# EAGLE board TA323v1 (EAGLE 7.2.0)
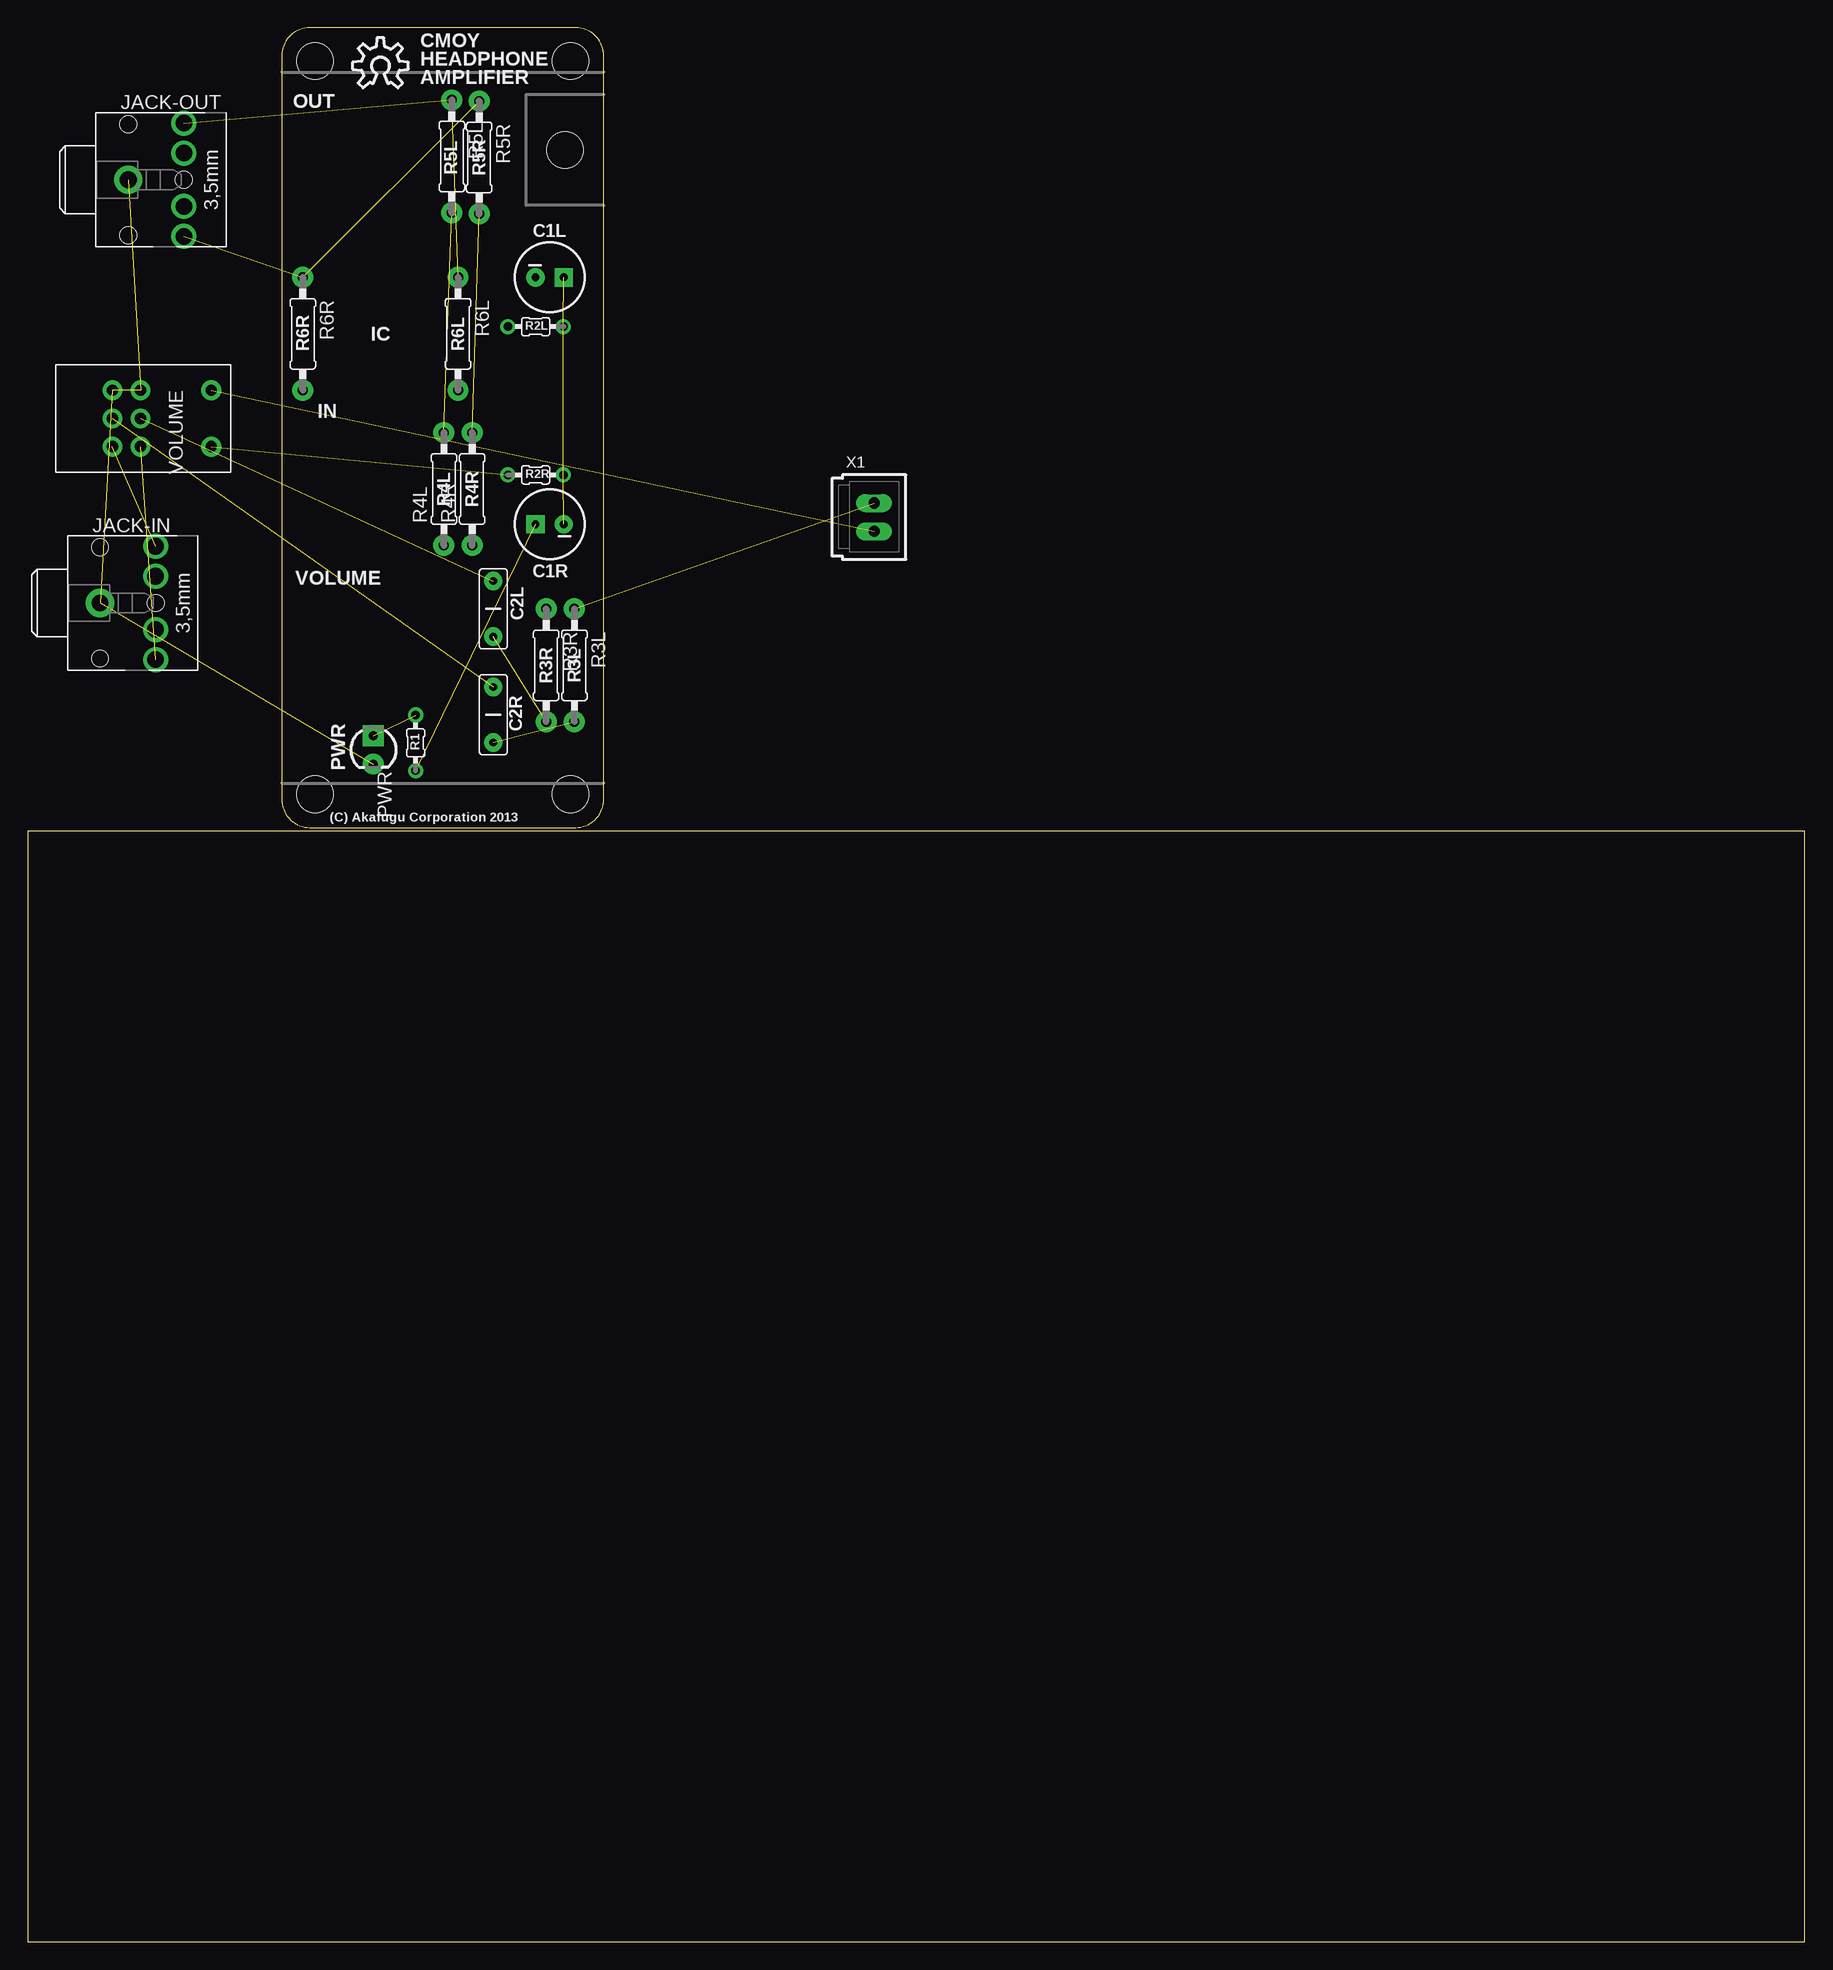
[diagram p0: board, top side]
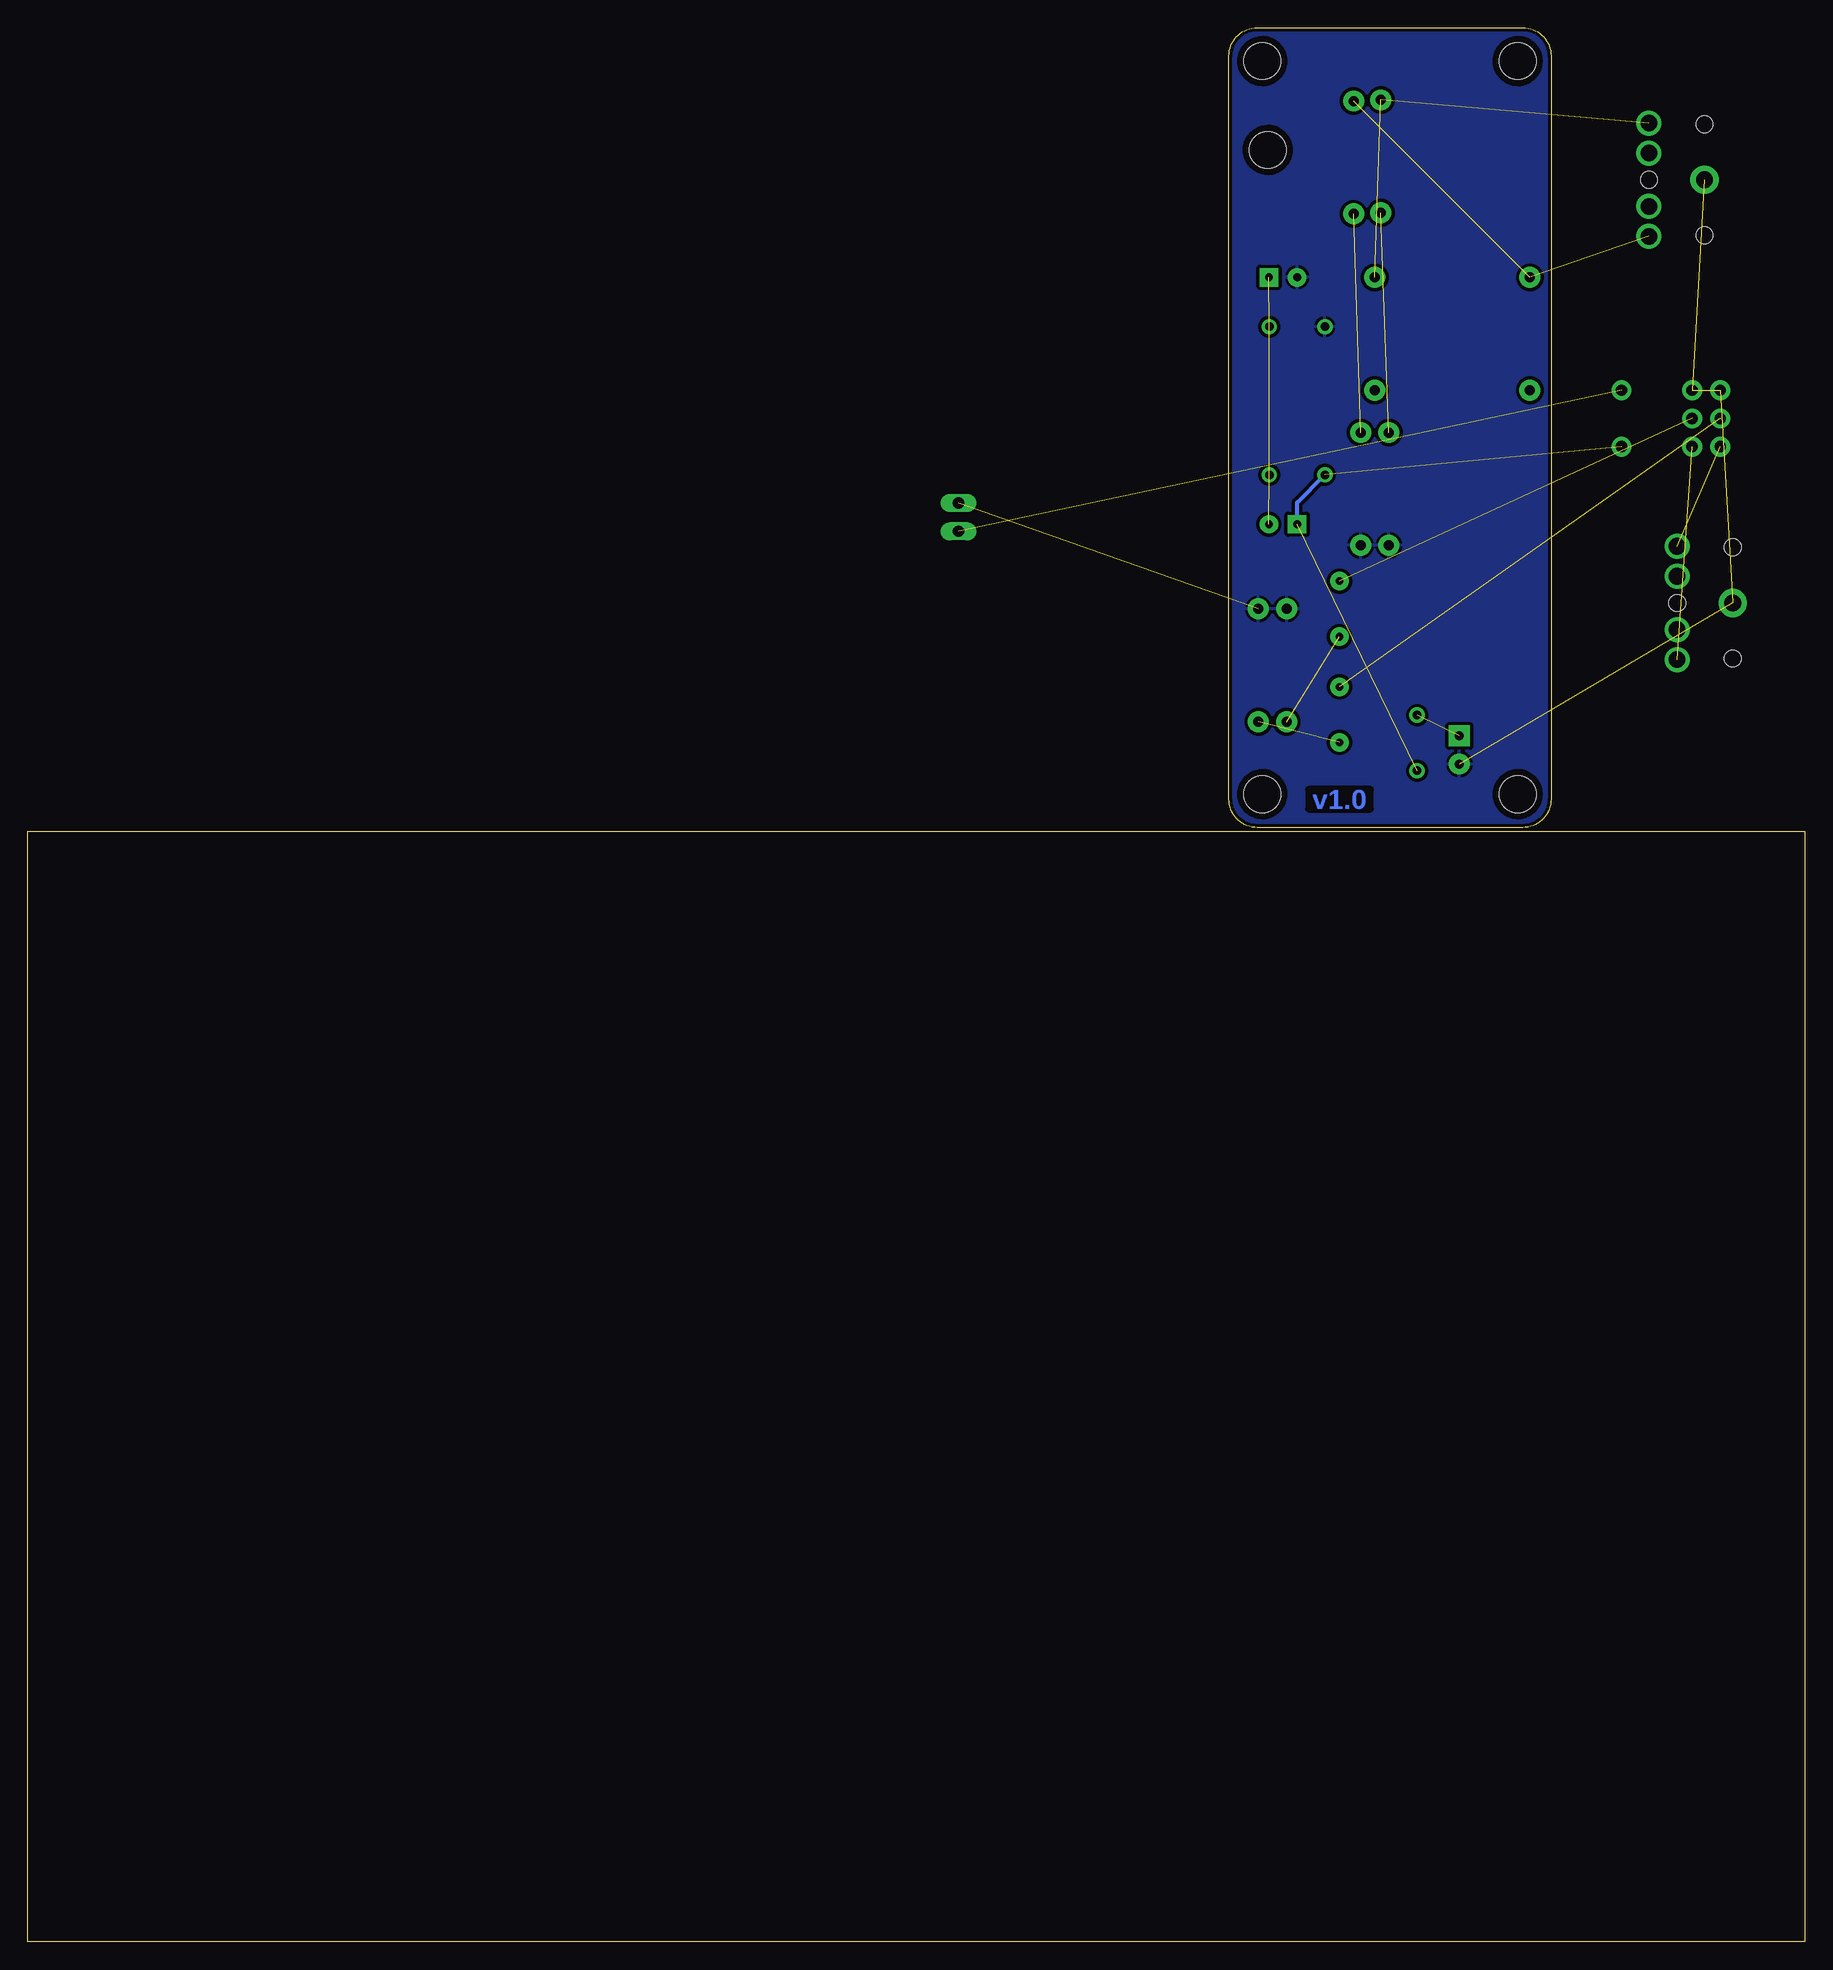
[diagram p1: board, bottom side, seen from below]

Size 160 x 172.33 mm. Coordinates in mm from the lower left corner, seen from the top.
Outline: 22.86,169.79 22.86,102.87 arc90 25.4,100.33 49.32,100.33 arc90 51.86,102.87 51.86,169.79 arc90 49.32,172.33 25.4,172.33 arc90 22.86,169.79
Outline: 0,0 160,0 160,100 0,100 0,0
Copper layers (1*16): Top 0.035mm / dielectric 1.5mm / Bottom 0.035mm
Design rules "default": minimum track width 10mil, minimum drill 12mil, track to track 8mil, track to pad 8mil, pad to pad 8mil, via to via 8mil, smd to smd 0mil, copper to edge 12mil, drill to drill 10mil, minimum pad ring 12mil, minimum via ring 6mil, stop-mask expansion 2mil, vias tented up to drill 45mil, thermal gap 10mil
Net classes: 0 default: width 0.254 mm, drill 0.305 mm, clearance 0.152 mm

## Footprints (pad centres in the part's own frame; a part is rotated, then mirrored left to right if it is on the bottom)
CPOL-RADIAL-6.3MM = drill 0.7 pad 1.651 square: 1 1.27,0 | drill 0.7 pad 1.651: 2 -1.27,0
CAP-PTH-VIMA-MKS2C031001A00KSSD = drill 0.7 pad 1.651: 1 -2.5,0; 2 2.5,0
STX3100 = drill 1.5 pad 2.54: 1 2.7,-0.1 | drill 1.5: 2 7.7,5; 3 7.7,2.3; 4 7.7,-2.5; 5 7.7,-5.2 | hole 1.5: 2.7,4.9; 2.7,-5.1; 7.7,-0.1
STAND-OFF = hole 3.302: 0,0
LED3MM-MINUS = drill 0.813 pad 1.88 square: A -1.27,0 | drill 0.813 pad 1.88: K 1.27,0
1/6W-RES-OUTLINE = drill 0.762: 1 -2.5,0; 2 2.5,0
1/4W-RES-OUTLINE = drill 0.9 pad 1.88: P$1 -5.08,0; P$2 5.08,0
ALPS_RK0971221Z0X = drill 1.016 pad 1.778: G1 2.54,-2.54; G2 0,-2.54; I1 2.54,2.54; I2 0,2.54; O1 2.54,0; O2 0,0; S1 -6.35,-2.54; S2 -6.35,2.54
70543-02 = drill 1.016 long: 1 -1.27,0; 2 1.27,0

## Placement (x,y rotation side)
C1L  220uF  [CPOL-RADIAL-6.3MM]  46.99,149.86 0 top
C1R  220uF  [CPOL-RADIAL-6.3MM]  46.99,127.63 180 top
C2L  0.1uF  [CAP-PTH-VIMA-MKS2C031001A00KSSD]  41.91,110.49 270 top
C2R  0.1uF  [CAP-PTH-VIMA-MKS2C031001A00KSSD]  41.91,120.02 270 top
JACK-IN  STEREOJACK  [STX3100]  3.81,120.65 0 top
JACK-OUT  STEREOJACK  [STX3100]  6.35,158.75 0 top
JP1  STAND-OFF  [STAND-OFF]  25.86,103.33 0 top
JP2  STAND-OFF  [STAND-OFF]  25.86,169.33 0 top
JP3  STAND-OFF  [STAND-OFF]  48.86,169.33 0 top
JP4  STAND-OFF  [STAND-OFF]  48.86,103.33 0 top
JP5  STAND-OFF  [STAND-OFF]  48.36,161.33 0 top
PWR  [LED3MM-MINUS]  31.12,107.31 270 top
R1  10k  [1/6W-RES-OUTLINE]  34.92,107.95 270 top
R2L  4.7k  [1/6W-RES-OUTLINE]  45.72,145.41 0 top
R2R  4.7k  [1/6W-RES-OUTLINE]  45.72,132.08 180 top
R3L  100k  [1/4W-RES-OUTLINE]  49.21,114.94 270 top
R3R  100k  [1/4W-RES-OUTLINE]  46.67,114.94 270 top
R4L  2k  [1/4W-RES-OUTLINE]  37.47,130.81 90 top
R4R  2k  [1/4W-RES-OUTLINE]  40,130.81 90 top
R5L  10k  [1/4W-RES-OUTLINE]  38.18,160.75 270 top
R5R  10k  [1/4W-RES-OUTLINE]  40.64,160.66 270 top
R6L  47R  [1/4W-RES-OUTLINE]  38.73,144.78 270 top
R6R  47R  [1/4W-RES-OUTLINE]  24.77,144.78 270 top
U$1  OSHW-LOGO-OUTLINE  [OSHW-LOGO-OUTLINE]  31.75,168.91 0 top
VOLUME  10k  [ALPS_RK0971221Z0X]  10.16,137.16 180 top
X1  C-GRID-02-70543  [70543-02]  76.2,128.27 270 top

## Library data of the parts
C1L C1R C2L C2R JACK-IN JACK-OUT PWR R1 R2L R2R R3L R3R R4L R4R R5L R5R R6L R6R U$1 = akafugu
JP1-JP5 = SparkFun
VOLUME = audio-pots
X1 = con-molex; OC_FARNELL: unknown; OC_NEWARK: unknown

## Nets
+9V: C1R.1 R1.2 R2R.2 VOLUME.S2
GND: C1L.2 JACK-IN.1 JACK-OUT.1 PWR.K R2L.1 R3L.P$1 R3R.P$1 R4L.P$1 R4R.P$1 VOLUME.G1 VOLUME.G2 X1.1
INPUT-L: JACK-IN.2 VOLUME.I1
INPUT-R: JACK-IN.5 VOLUME.I2
L+: C2L.2 R3L.P$2
L-: R4L.P$2 R5L.P$2
N$1: PWR.A R1.1
N$2: VOLUME.S1 X1.2
N$3: C1L.1 C1R.2 R2L.2 R2R.1
OP-L: R6L.P$2
OP-R: R6R.P$2
OUTPUT-L: JACK-OUT.2 R5L.P$1 R6L.P$1
OUTPUT-R: JACK-OUT.5 R5R.P$1 R6R.P$1
R+: C2R.2 R3R.P$2
R-: R4R.P$2 R5R.P$2
VOLUME-OUT-L: C2L.1 VOLUME.O1
VOLUME-OUT-R: C2R.1 VOLUME.O2

## Tracks (layer width: path | path; a pad name or v marks a point on that pad's centre or on a via)
+9V  (2 unrouted)
  Bottom 0.381: C1R.1 45.72,129.58 R2R.2
GND  (5 unrouted)
  pour Bottom (isolate 0.305): 22.22,173.76 53.44,173.76 53.44,99.69 22.22,99.69
INPUT-L  (1 unrouted)
INPUT-R  (1 unrouted)
L+  (1 unrouted)
L-  (1 unrouted)
N$1  (1 unrouted)
N$2  (1 unrouted)
N$3  (3 unrouted)
OUTPUT-L  (2 unrouted)
OUTPUT-R  (2 unrouted)
R+  (1 unrouted)
R-  (1 unrouted)
VOLUME-OUT-L  (1 unrouted)
VOLUME-OUT-R  (1 unrouted)

## Text on the board
Bottom: v1.0
tPlace: CMOY | HEADPHONE | AMPLIFIER | OUT | R5L | R5R | C1L | R6R | R2L | IC | R6L | IN | R2R | R4L | R4R | C1R | VOLUME | C2L | R3R | R3L | C2R | R1 | PWR | (C) Akafugu Corporation 2013